# Altium PCB PCB_转接板1_含压缩推杆控制.pcbdoc
Units mm, origin at the board's own origin, x right, y up, seen from the top; angles counter-clockwise.
Board outline 99.82 x 24.38 mm, 2 copper layers (Top Layer, Bottom Layer); 14 components, 31 nets, 64 pads, 2 vias.
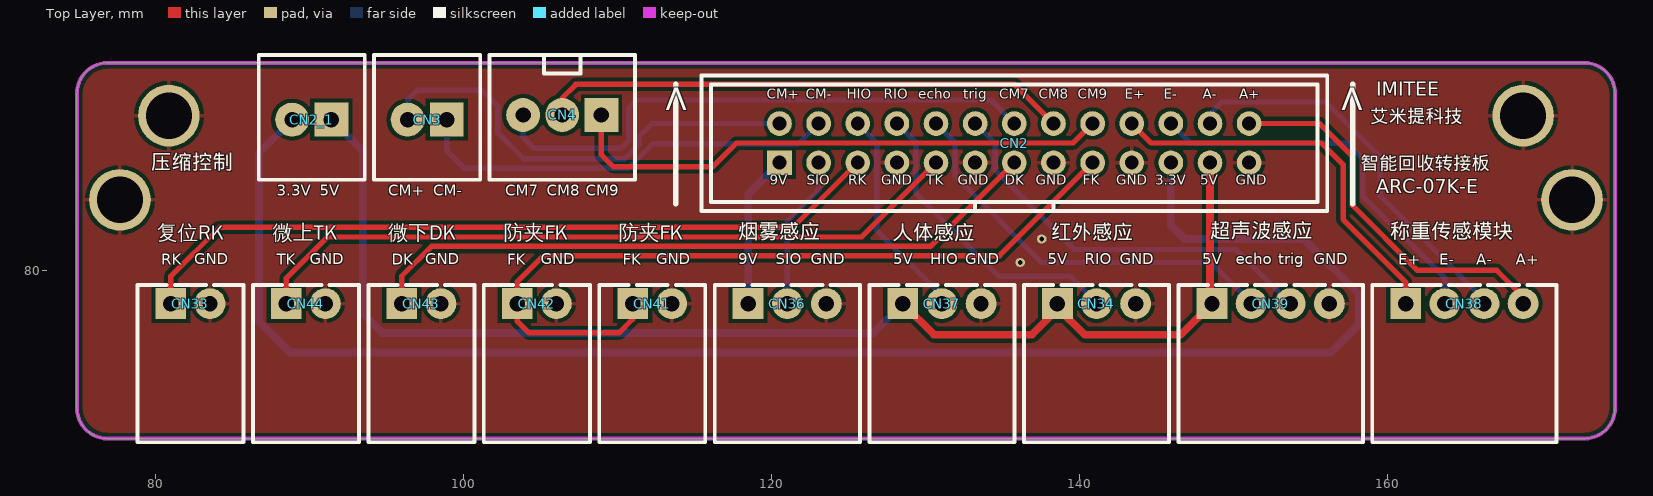
[diagram p0: Top Layer view]
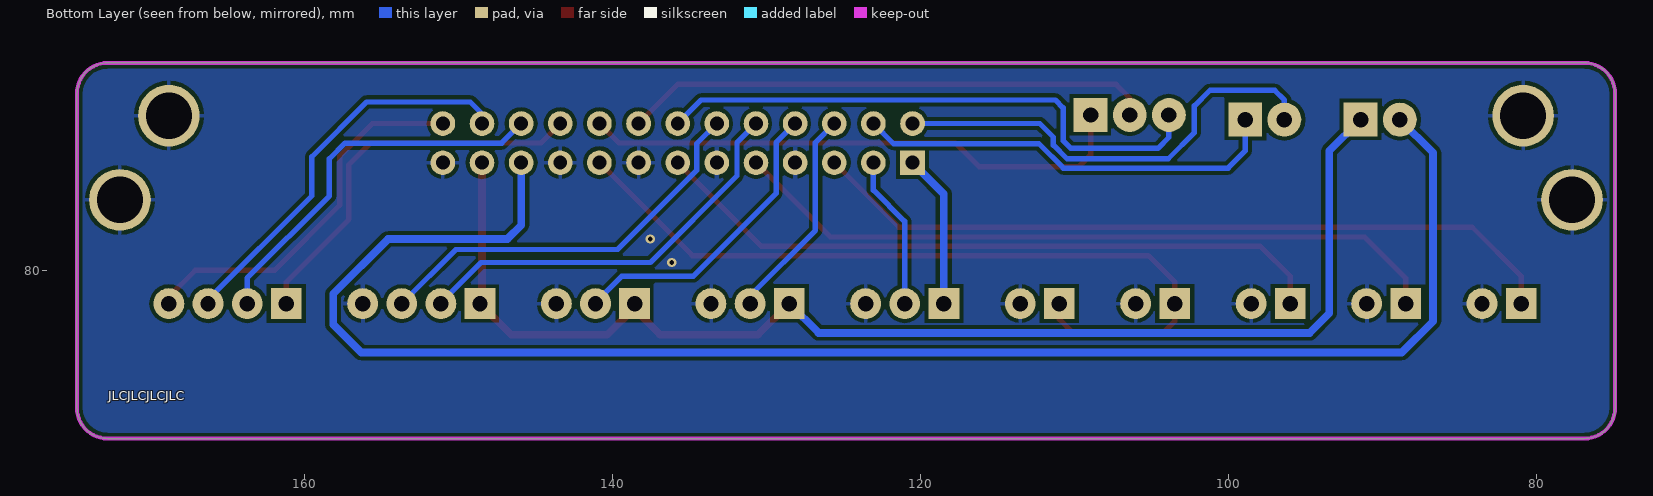
[diagram p1: Bottom Layer view, seen from below]

## Layer stack, top to bottom
Top Solder: solder mask 0.0102, Solder Resist, Dk 3.5
Top Layer: signal copper 0.0356
Dielectric1: dielectric 0.32, FR-4, Dk 4.8
Bottom Layer: signal copper 0.0356
Bottom Solder: solder mask 0.0102, Solder Resist, Dk 3.5

## Board outline
74.93,71.089 ccw(c76.93,71.089) 76.93,69.089 172.752,69.089 ccw(c172.752,71.089) 174.752,71.089 174.752,91.473 ccw(c172.752,91.473) 172.752,93.473 76.93,93.473 ccw(c76.93,91.473) 74.93,91.473

## Design rules (kind name [scope] priority, off if disabled: settings)
Clearance [All] p1: gap=0.254 ignorepadtopadclearanceinfootprint=FALSE except(0: Arc-Hole Track-Hole SMDPad-Hole THPad-Hole Via-Hole Fill-Hole Poly-Hole Region-Hole Text-Hole)
PolygonConnect [All] p1: connectstyle=Relief reliefconductorwidth=0.254 reliefentries=4 polygonreliefangle="90 Angle" airgapwidth=0.254
RoutingVias [All] p1: holewidth=0.711 width=1.27 viastyle="Through Hole" minholewidth=0.711 minwidth=1.27 maxholewidth=0.711 maxwidth=1.27
SolderMaskExpansion [All] p1: expansion=0.102
Width [All] p1: maxlimit=0.5 minlimit=0.254 preferedwidth=0.35 minimp=50.000000 maximp=50.000000 favimp=50.000000
30 further rules are at their usual default settings.

## Components (designator, comment, footprint, x,y, rotation, side; value= is the part's Value field where it differs from the comment)
CN2 "Shenzhen" CONN-TH_26P-P2.54_B-3000S26P-0110 135.763,88.265 r0 top (schematic designator CN1)
CN2_1 "KF2EDGV-2.54-2P" CONN-TH_KF2EDGV-2.54-2P 90.17,89.789 r180 top (schematic designator CN2)
CN3 "KF2EDGV-2.54-2P" CONN-TH_KF2EDGV-2.54-2P 97.663,89.789 r180 top
CN4 "KF2EDGV-2.54-3P" CONN-TH_3P-P2.54_KF2EDGV-2.54-3P 106.426,90.089 r0 top
CN33 "KF2EDGR-2.54-2P" CONN-TH_P2.54_KF2EDGR-2.54-2P 82.296,77.851 r0 top
CN34 "KF2EDGR-2.54-3P" CONN-TH_3P-P2.54_KF2EDGR-2.54-3P 141.097,77.851 r0 top
CN36 "KF2EDGR-2.54-3P" CONN-TH_3P-P2.54_KF2EDGR-2.54-3P 121.031,77.851 r0 top
CN37 "KF2EDGR-2.54-3P" CONN-TH_3P-P2.54_KF2EDGR-2.54-3P 131.064,77.851 r0 top (schematic designator CN36)
CN38 "KF2EDGR-2.54-4P" CONN-TH_4P-P2.54_KF2EDGR-2.54-4P 164.973,77.851 r0 top
CN39 "KF2EDGR-2.54-4P" CONN-TH_4P-P2.54_KF2EDGR-2.54-4P 152.4,77.851 r0 top
CN41 "KF2EDGR-2.54-2P" CONN-TH_P2.54_KF2EDGR-2.54-2P 112.268,77.851 r0 top
CN42 "KF2EDGR-2.54-2P" CONN-TH_P2.54_KF2EDGR-2.54-2P 104.775,77.851 r0 top
CN43 "KF2EDGR-2.54-2P" CONN-TH_P2.54_KF2EDGR-2.54-2P 97.282,77.851 r0 top
CN44 "KF2EDGR-2.54-2P" CONN-TH_P2.54_KF2EDGR-2.54-2P 89.789,77.851 r0 top

## Footprints (in the part's own frame and the unit in brackets; to place one, negate y for a bottom-side part, rotate by r counter-clockwise, add the part's x,y. Pads: shape width x height; smd on the part's side, far side on the other; paste and mask are expansions set on the pad)
CONN-TH_3P-P2.54_KF2EDGR-2.54-3P [mm]
  rect 2x2 hole 1: 1(-2.54,0)
  round 2 hole 1: 2(0,0) 3(2.54,0)
  silkscreen extent -4.71,-9 4.71,1.2
CONN-TH_3P-P2.54_KF2EDGV-2.54-3P [mm]
  rect 2.2x2.2 hole 1: 1(2.54,0)
  round 2.2 hole 1: 2(0,0) 3(-2.54,0)
  silkscreen extent -4.71,-4.2 4.71,3.9
CONN-TH_4P-P2.54_KF2EDGR-2.54-4P [mm]
  rect 2x2 hole 1: 1(-3.81,0)
  round 2 hole 1: 2(-1.27,0) 3(1.27,0) 4(3.81,0)
  silkscreen extent -5.98,-9 5.98,1.2
CONN-TH_26P-P2.54_B-3000S26P-0110 [mm]
  rect 1.6x1.6 hole 0.9: 1(-15.24,-1.27)
  round 1.6 hole 0.9: 2(-15.24,1.27) 3(-12.7,-1.27) 4(-12.7,1.27) 5(-10.16,-1.27) 6(-10.16,1.27) 7(-7.62,-1.27) 8(-7.62,1.27) 9(-5.08,-1.27) 10(-5.08,1.27) 11(-2.54,-1.27) 12(-2.54,1.27) 13(0,-1.27) 14(0,1.27) 15(2.54,-1.27) 16(2.54,1.27) 17(5.08,-1.27) 18(5.08,1.27) 19(7.62,-1.27) 20(7.62,1.27) 21(10.16,-1.27) 22(10.16,1.27) 23(12.7,-1.27) 24(12.7,1.27) 25(15.24,-1.27) 26(15.24,1.27)
  silkscreen extent -20.31,-4.4 20.31,4.4
CONN-TH_KF2EDGV-2.54-2P [mm]
  rect 2.2x2.2 hole 1: 1(-1.27,0)
  round 2.2 hole 1: 2(1.27,0)
  silkscreen extent -3.44,-4.2 3.44,3.9
CONN-TH_P2.54_KF2EDGR-2.54-2P [mm]
  rect 2x2 hole 1: 1(-1.27,0)
  round 2 hole 1: 2(1.27,0)
  silkscreen extent -3.44,-9 3.44,1.2

## Free pads (board coordinates)
  round 4 hole 3: ""(77.724,84.582) ""(80.899,90.043) ""(168.783,90.043) ""(171.958,84.582)

## Via types
v1: diameter 0.6, hole 0.3, Top Layer to Bottom Layer, 2 vias

## Nets (pads, with @x,y where several pads share a name; then routed paths per layer and width w, separated by ;. In a path a pad name is that pad's centre, name@x,y a point inside that pad or via, vN(x,y) a via of type N, cw(c..) or ccw(c..) an arc to the next point about the centre after c; other vN are vias at no path point)
3.3V: CN2.21 CN2_1.2 | length 107
  Bottom Layer w0.5: CN2_1.2 86.741,87.63 86.741,76.708 88.773,74.676 156.298,74.676 158.115,76.493 158.115,78.486 154.559,82.042 146.812,82.042 145.923,82.931 CN2.21
5V: CN2.23 CN2_1.1 CN34.1 CN37.1 CN39.1 | length 82.5
  Top Layer w0.5: CN37.1 130.556,75.819 136.906,75.819 138.557,77.47 CN34.1@138.557,77.597 ; CN34.1 CN34.1@138.557,77.597 ; CN2.23 148.463,77.978 CN39.1 146.558,75.819 140.335,75.819 CN34.1@138.557,77.597
  Bottom Layer w0.5: CN2_1.1 93.472,87.757 93.472,77.216 94.742,75.946 126.619,75.946 CN37.1
9V: CN2.1 CN36.1 | length 10
  Bottom Layer w0.5: CN36.1 118.491,84.963 CN2.1
A1: 
A2: 
A3: 
A4: 
A+: CN2.26 CN38.4 | length 24.7
  Top Layer w0.35: CN2.26 155.575,89.535 157.703,87.407 157.703,84.232 161.925,80.01 167.07,80.01 168.783,78.297 CN38.4
A-: CN2.24 CN38.3 | length 25.8
  Bottom Layer w0.35: CN2.24 148.463,90.17 149.225,90.932 155.956,90.932 159.512,87.376 159.512,84.836 166.243,78.105 CN38.3
CM7: CN2.14 CN4.3 | length 36.8
  Bottom Layer w0.35: CN4.3 103.886,88.646 104.607,87.925 110.244,87.925 110.744,88.425 110.744,90.551 111.252,91.059 134.239,91.059 CN2.14
CM8: CN2.16 CN4.2 | length 35
  Top Layer w0.35: CN4.2@106.426,89.454 CN4.2 106.426,91.186 107.315,92.075 135.763,92.075 CN2.16
CM9: CN2.18 CN4.1 | length 35.3
  Top Layer w0.35: CN4.1@108.966,89.454 108.966,87.503 109.728,86.741 116.205,86.741 117.736,88.272 139.58,88.272 CN2.18
CM+: CN2.2 CN3.2 | length 30.4
  Bottom Layer w0.35: CN3.2@96.393,89.154 CN3.2 96.393,91.059 97.028,91.694 101.219,91.694 102.235,90.678 102.235,88.943 103.929,87.249 110.49,87.249 111.379,88.138 111.379,88.646 112.268,89.535 CN2.2
CM-: CN2.4 CN3.1 | length 27.8
  Bottom Layer w0.35: CN3.1 98.933,87.757 100.045,86.645 110.74,86.645 112.319,88.224 121.752,88.224 CN2.4
DK: CN2.13 CN43.1 | length 44.6
  Top Layer w0.35: CN43.1 96.012,79.629 97.948,81.565 130.333,81.565 CN2.13
E+: CN2.20 CN38.1 | length 25.5
  Top Layer w0.35: CN2.20 144.646,88.272 155.695,88.272 157.099,86.868 157.099,83.312 161.163,79.248 CN38.1
E-: CN2.22 CN38.2 | length 25
  Bottom Layer w0.35: CN2.22 147.193,88.265 157.353,88.265 158.369,87.249 158.369,84.836 163.703,79.502 CN38.2
ECHO: CN2.10 CN39.2 | length 26.6
  Bottom Layer w0.35: CN2.10 131.912,88.306 131.912,86.147 137.541,80.518 148.53,80.518 151.13,77.918 CN39.2
FK: CN2.17 CN41.1 CN42.1 | length 52.3
  Top Layer w0.35: CN41.1 110.998,76.835 110.109,75.946 104.267,75.946 103.505,76.708 CN42.1 103.505,79.248 105.218,80.961 134.809,80.961 CN2.17
GND: CN2.7 CN2.11 CN2.15 CN2.19 CN2.25 CN33.2 CN34.3 CN36.3 CN37.3 CN39.4 CN41.2 CN42.2 CN43.2 CN44.2 pad.
  other v1: 136.144,80.518 137.541,82.042
HIO: CN2.6 CN37.2 | length 13.9
  Bottom Layer w0.35: CN2.6 126.832,88.306 126.832,82.591 131.064,78.359 CN37.2
IO1: 
IO2: 
IO3: 
IO4: 
IO5: 
RIO: CN2.8 CN34.2 | length 19.8
  Bottom Layer w0.35: CN2.8 129.372,88.306 129.372,85.004 134.747,79.629 139.386,79.629 141.097,77.918 CN34.2
RK: CN2.5 CN33.1 | length 49.4
  Top Layer w0.35: CN33.1 81.026,79.629 84.201,82.804 121.412,82.804 CN2.5
SIO: CN2.3 CN36.2 | length 10
  Bottom Layer w0.35: CN36.2 121.031,83.185 123.063,85.217 CN2.3
TK: CN2.9 CN44.1 | length 46.9
  Top Layer w0.35: CN44.1 88.519,79.502 91.186,82.169 125.857,82.169 CN2.9
TRIG: CN2.12 CN39.3 | length 26.3
  Bottom Layer w0.35: CN2.12 134.534,88.224 134.534,87.504 134.534,86.486 139.657,81.363 150.158,81.363 CN39.3

## Polygon pours and split planes (outlines as drawn)
GND on Top Layer "Top Layer-No Net" (solid, pour order 4): 74.93,71.089 ccw(c76.93,71.089) 76.93,69.089 172.752,69.089 ccw(c172.752,71.089) 174.752,71.089 174.752,91.473 ccw(c172.752,91.473) 172.752,93.473 76.93,93.473 ccw(c76.93,91.473) 74.93,91.473
GND on Bottom Layer "Top Layer-No Net1" (solid, pour order 5): 74.93,71.089 ccw(c76.93,71.089) 76.93,69.089 172.752,69.089 ccw(c172.752,71.089) 174.752,71.089 174.752,91.473 ccw(c172.752,91.473) 172.752,93.473 76.93,93.473 ccw(c76.93,91.473) 74.93,91.473

## Keep-outs
Keep-Out Layer:
  the board outline again, w0.254

## Silkscreen, mask and mechanical layers (free items; w line width, h text height)
Top Overlay:
  lines w0.35: 113.792,84.328 113.792,92.075 ; 157.734,84.328 157.734,92.075
  text "V" at 113.157,92.329 h2.5 r180
  text "V" at 158.369,92.329 h2.5 r180
  text "IMITEE" at 159.258,91.059 h1.53
  text "echo" at 129.54,90.932 h1.1
  text "trig" at 132.461,90.932 h1.1
  text "A+" at 150.368,90.932 h1.1
  text "CM+" at 119.684,90.912 h1.1
  text "CM-" at 122.224,90.912 h1.1
  text "HIO" at 124.891,90.912 h1.1
  text "RIO" at 127.304,90.912 h1.1
  text "CM7" at 134.797,90.912 h1.1
  text "CM8" at 137.337,90.912 h1.1
  text "CM9" at 139.877,90.912 h1.1
  text "E+" at 142.925,90.912 h1.1
  text "E-" at 145.465,90.912 h1.1
  text "A-" at 148.005,90.912 h1.1
  text "艾米提科技" at 158.877,89.281 h1.5
  text "压缩控制" at 79.756,86.233 h1.68
  text "智能回收转接板" at 158.242,86.233 h1.5
  text "SIO" at 122.301,85.344 h1.1
  text "GND" at 127.127,85.344 h1.1
  text "GND" at 132.08,85.344 h1.1
  text "GND" at 137.16,85.344 h1.1
  text "FK" at 140.208,85.344 h1.1
  text "GND" at 142.367,85.344 h1.1
  text "3.3V" at 144.907,85.344 h1.1
  text "9V" at 119.903,85.324 h1.1
  text "RK" at 124.983,85.324 h1.1
  text "TK" at 130.063,85.324 h1.1
  text "DK" at 135.143,85.324 h1.1
  text "5V" at 147.843,85.324 h1.1
  text "GND" at 150.129,85.324 h1.1
  text "ARC-07K-E" at 159.258,84.709 h1.53
  text "3.3V" at 87.884,84.582 h1.23
  text "5V" at 90.678,84.582 h1.23
  text "CM+" at 95.123,84.582 h1.23
  text "CM-" at 98.044,84.582 h1.23
  text "CM7" at 102.743,84.582 h1.23
  text "CM8" at 105.41,84.582 h1.23
  text "CM9" at 107.95,84.582 h1.23
  text "超声波感应" at 148.463,81.788 h1.68
  text "称重传感模块" at 160.147,81.757 h1.68
  text "烟雾感应" at 117.856,81.736 h1.68
  text "红外感应" at 138.176,81.704 h1.68
  text "复位RK" at 80.137,81.661 h1.68
  text "微上TK" at 87.63,81.661 h1.68
  text "微下DK" at 95.123,81.661 h1.68
  text "防夹FK" at 102.616,81.661 h1.68
  text "防夹FK" at 110.109,81.661 h1.68
  text "人体感应" at 127.889,81.661 h1.68
  text "GND" at 82.55,80.137 h1.23
  text "GND" at 90.043,80.137 h1.23
  text "GND" at 97.536,80.137 h1.23
  text "GND" at 105.029,80.137 h1.23
  text "GND" at 112.522,80.137 h1.23
  text "9V" at 117.856,80.137 h1.23
  text "SIO" at 120.284,80.137 h1.23
  text "GND" at 122.555,80.137 h1.23
  text "5V" at 127.904,80.137 h1.23
  text "HIO" at 130.317,80.137 h1.23
  text "GND" at 132.588,80.137 h1.23
  text "5V" at 137.937,80.137 h1.23
  text "RIO" at 140.35,80.137 h1.23
  text "GND" at 142.621,80.137 h1.23
  text "5V" at 147.955,80.137 h1.23
  text "echo" at 150.129,80.137 h1.23
  text "trig" at 152.908,80.137 h1.23
  text "GND" at 155.194,80.137 h1.23
  text "RK" at 80.391,80.124 h1.23
  text "TK" at 87.884,80.124 h1.23
  text "DK" at 95.377,80.124 h1.23
  text "FK" at 102.87,80.124 h1.23
  text "FK" at 110.363,80.124 h1.23
  text "E+" at 160.67,80.124 h1.23
  text "E-" at 163.337,80.124 h1.23
  text "A-" at 165.75,80.124 h1.23
  text "A+" at 168.29,80.124 h1.23
Bottom Overlay:
  text "JLCJLCJLCJLC" at 172.72,71.374 h1
Document:
  lines w0.003: 88.552,84.612 88.603,84.662